# Altium PCB MB895.PCBDOC
Units mil, origin at the board's own origin, x right, y up, seen from the top; angles counter-clockwise.
Board outline 3325 x 1735.28 mil, 2 copper layers (TopLayer, BottomLayer); 41 components, 40 nets, 213 pads, 137 vias.
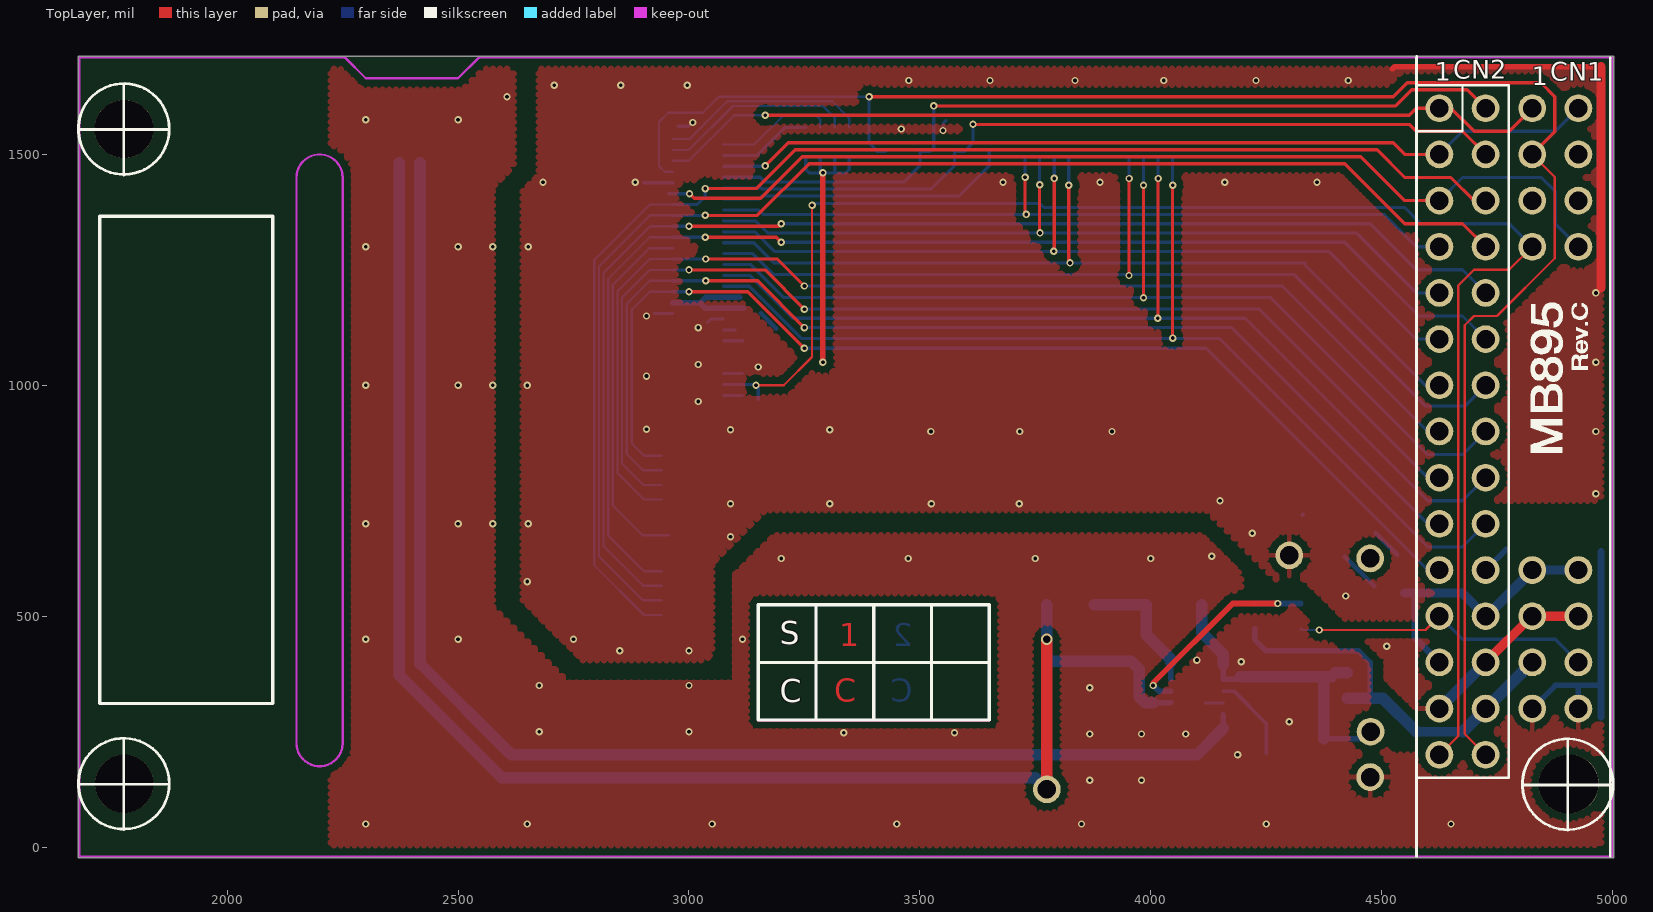
[diagram p0: TopLayer view]
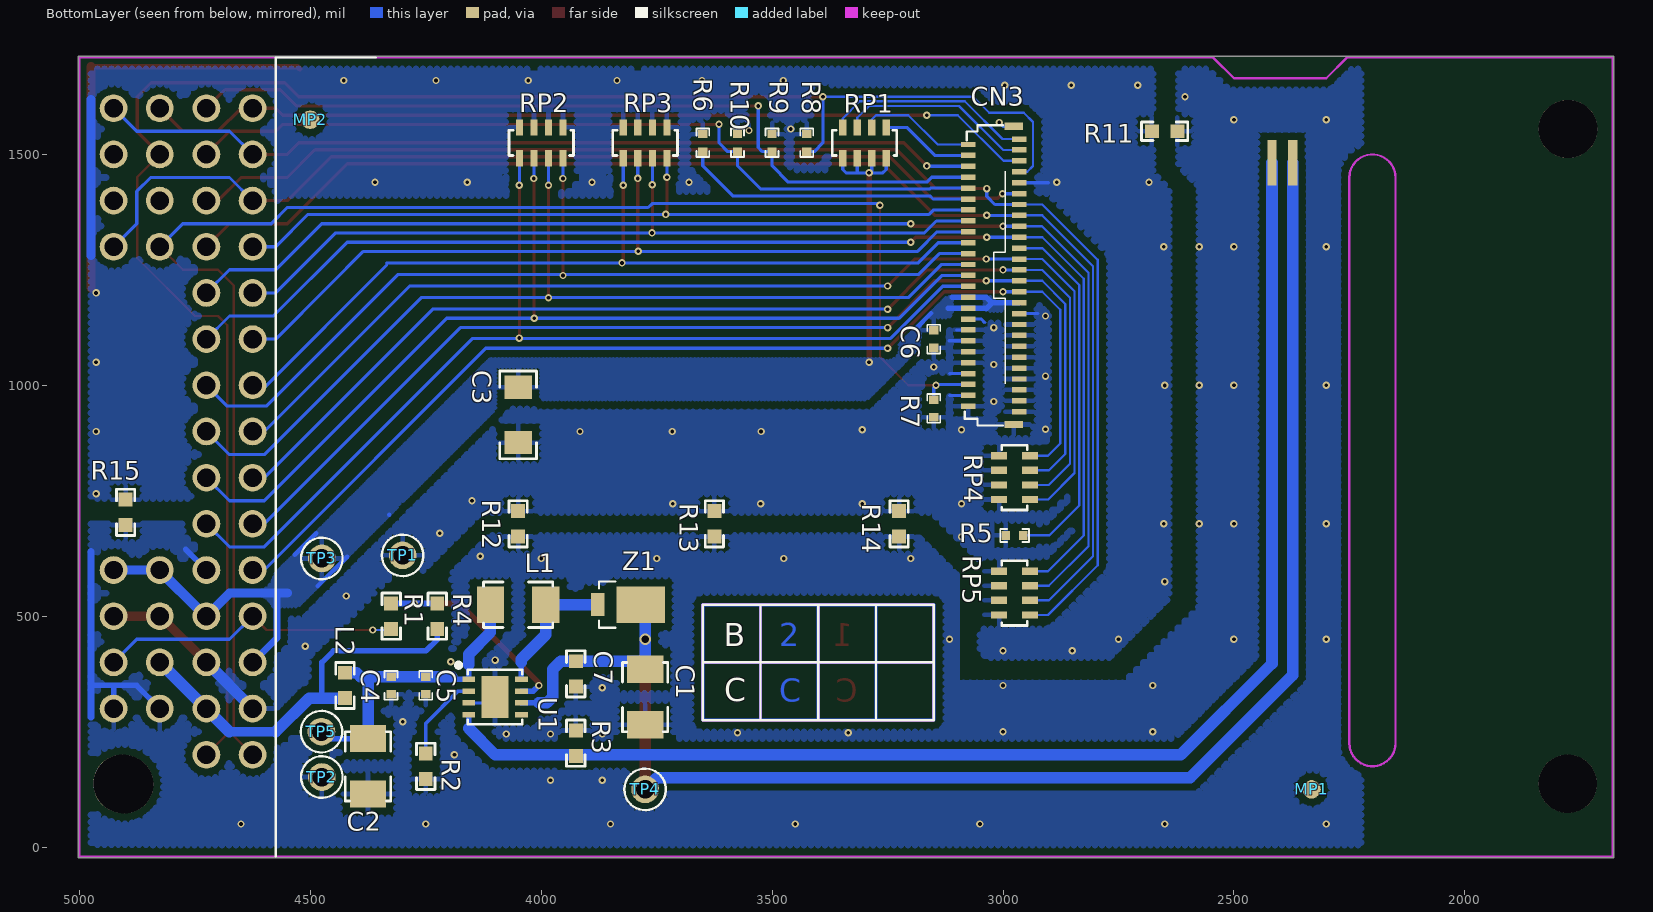
[diagram p1: BottomLayer view, seen from below]

## Layer stack, top to bottom
TopSolder: solder mask 0.4, Solder Resist, Dk 3.5
TopLayer: signal copper 1.4
Dielectric1: core 12.6, FR-4, Dk 4.8
BottomLayer: signal copper 1.4
BottomSolder: solder mask 0.4, Solder Resist, Dk 3.5

## Board outline
1677.5,-22.78 5002.5,-22.78 5002.5,1712.5 1677.5,1712.5

## Design rules (kind name [scope] priority, off if disabled: settings)
Clearance Clearance_5 [(InPoly)] p1: gap=15 ignorepadtopadclearanceinfootprint=FALSE except(0: Arc-Hole Track-Hole SMDPad-Hole THPad-Hole Via-Hole Fill-Hole Poly-Hole Region-Hole Text-Hole)
Clearance [All] p2: gap=5 ignorepadtopadclearanceinfootprint=FALSE except(0: Arc-Hole Track-Hole SMDPad-Hole THPad-Hole Via-Hole Fill-Hole Poly-Hole Region-Hole Text-Hole)
ComponentClearance [All] p1 off: gap=10 collisioncheckmode=3 verticalgap=10 showdistances=FALSE
FabricationTestPointUsage TestPointUsage [All] p1: valid=0 allowmultiple=FALSE
FabricationTestpoint Testpoint [All] p1: side=3 testpointundercomponent=TRUE minsize=40 maxsize=100 preferedsize=60 minholesize=20 maxholesize=40 preferedholesize=32 testpointgrid=1 allowsidetop=TRUE allowsidebottom=TRUE usegrid=TRUE gridtolerance=0.01
PolygonConnect [All] p1: connectstyle=Relief reliefconductorwidth=10 reliefentries=4 polygonreliefangle="90 Angle" airgapwidth=10
RoutingVias RoutingVias_1 [All] p1: holewidth=8 width=16 viastyle="Through Hole" minholewidth=8 minwidth=16 maxholewidth=28 maxwidth=50
SolderMaskExpansion [All] p1: expansion=4 istentingtop=FALSE
Width Width_1 [InNet('BLGND')] p1: maxlimit=300 minlimit=7 preferedwidth=12
Width Width_2 [InNet('BLVDD')] p2: maxlimit=300 minlimit=7 preferedwidth=12
Width Width_3 [InNet('VDD')] p3: maxlimit=300 minlimit=7 preferedwidth=10
Width [All] p4: maxlimit=300 minlimit=5 preferedwidth=7
27 further rules are at their usual default settings.

## Classes and differential pairs
component class MB895C: C1 C2 C3 C4 C5 C6 CN1 CN2 CN3 L1 L2 MP1 MP2 R1 R2 R3 R4 R5 R6 R7 R8 R9 R10 R11 R12 R13 R14 R15 RP1 RP2 RP3 RP4 RP5 U1 Z1
component class MB694: C1 C2 C3 CN3 L1 R1 R2 R3 R4 R5 R6 R7 R8 R9 R10 RP1 RP2 RP3 RP4 RP5 U1 Z1
component class MB542: C1 C2 CN3 L1 R1 R2 R3 R4 R5 R6 R7 R8 R9 R10 R11 R12 RP1 RP2 RP3 RP4 RP5 U2 Z1
component class ColorLCD_Module: C1 C2 CN3 L1 R1 R2 R3 R4 R5 R6 R7 R8 U2 Z1
component class ColorLCD_ModuleA: C1 C2 CN3 L1 R1 R2 R3 R4 R5 R6 R7 R8 RP1 RP2 RP3 RP4 RP5 U2 Z1
component class MB895: C1 C2 C3 C4 C5 C6 CN3 L1 L2 R1 R2 R3 R4 R5 R6 R7 R8 R9 R10 RP1 RP2 RP3 RP4 RP5 U1 Z1
component class MB895B: C1 C2 C3 C4 C5 C6 CN1 CN2 CN3 L1 L2 R1 R2 R3 R4 R5 R6 R7 R8 R9 R10 RP1 RP2 RP3 RP4 RP5 U1 Z1

## Components (designator, comment, footprint, x,y, rotation, side; value= is the part's Value field where it differs from the comment)
C1 "476P/35V" 3225C 3775,325 r90 bottom
C2 "476P/35V" 3225C 4375,175 r90 bottom
C3 "476P" 1206C 4050,935.72 r90 bottom
C4 "100nF" 0402C 4325,350 r270 bottom
C5 "10nF" 0402C 4250,350 r270 bottom
C6 "100nF" 0402C 3150,1100 r270 bottom
C7 "10nF" 0603C 3925,375 r270 bottom
CN1 "SPI connector" AM240320A 1777.06,137.28 r0 top
CN2 "16-bit connector" AM240*320B 1777.06,137.28 r0 top
CN3 "FH26W-51S-0.3SHW(60)" AM240320B 4575,1710 r180 bottom
L1 "4.7uH(1A)" 3225L 4050,525 r0 bottom
L2 "BEAD" 0603L 4425,350 r270 bottom
MP1 "" markpoint_1.0 2331.94,125 r0 top
MP2 "" markpoint_1.0 4500,1575 r0 top
R1 "0" 0603R 4325,500 r90 bottom
R2 "100K" 0603R 4250,175 r90 bottom
R3 "10" 0603R 3925,225 r90 bottom
R4 "[N/A]" 0603R 4225,500 r90 bottom
R5 "4K7" 0402R 2975,675 r0 bottom
R6 "4K7" 0402R 3650,1525 r90 bottom
R7 "4K7" 0402R 3150,950 r270 bottom
R8 "4K7" 0402R 3425,1525 r90 bottom
R9 "4K7" 0402R 3500,1525 r90 bottom
R10 "4K7" 0402R 3575,1525 r90 bottom
R11 "[N/A]" 0603R 2650,1550 r180 bottom
R12 "[N/A]" 0603R 4050,700 r270 bottom
R13 "[N/A]" 0603R 3625,700 r270 bottom
R14 "[N/A]" 0603R 3225,700 r270 bottom
R15 "[N/A]" 0603R 4900,725 r270 bottom
RP1 "10K" RES-4B#1 3300,1525 r0 bottom
RP2 "10K" RES-4B#2 4000,1525 r0 bottom
RP3 "10K" RES-4B#2 3775,1525 r0 bottom
RP4 "10K" RES-4B#1 2975,800 r90 bottom
RP5 "10K" RES-4B#1 2975,550 r90 bottom
TP1 "" TP 4300,631.72 r180 bottom
TP2 "" TP 4475,151.72 r180 bottom
TP3 "" TP 4475,625 r180 bottom
TP4 "" TP 3775,125 r180 bottom
TP5 "" TP 4475.94,250 r180 bottom
U1 "STLD40DPUR" QFNT8 4100,325 r270 bottom
Z1 "STPS1L40M" DO216AA 3850,525 r0 bottom

## Footprints (in the part's own frame and the unit in brackets; to place one, negate y for a bottom-side part, rotate by r counter-clockwise, add the part's x,y. Pads: shape width x height; smd on the part's side, far side on the other; paste and mask are expansions set on the pad)
0402C [mil]
  rect 18x20 smd: 1(19,0) 2(-19,0)
  silkscreen extent -31,-14 31,14
0402R [mil]
  rect 18x20 smd: 1(19,0) 2(-19,0)
  silkscreen extent -31,-14 31,14
0603C [mil]
  rect 30x30 smd: 1(27.5,0) 2(-27.5,0)
  silkscreen extent -50,-20 50,20
0603L [mil]
  rect 30x30 smd: 1(27.5,0) 2(-27.5,0)
  silkscreen extent -50,-20 50,20
0603R [mil]
  rect 30x30 smd: 1(27.5,0) 2(-27.5,0)
  silkscreen extent -50,-20 50,20
1206C [mil]
  rect 50x60 smd: 1(60,0) 2(-60,0)
  silkscreen extent -95,-40 95,40
3225C [mm]
  rect 1.5x2 smd: 1(1.524,0) 2(-1.524,0)
  silkscreen extent -1.91,-1.25 1.91,1.25
3225L [mm]
  rect 1.5x2 smd: 1(1.524,0) 2(-1.524,0)
  silkscreen extent -1.91,-1.25 1.91,1.25
AM240*320B [mil]
  round 125.98 hole 125.98 unplated: 0(-1,1417.72) 0(0,0) 0(3125.94,-1.28)
  round 60 hole 40: 1(2847.94,1462.72) 2(2947.94,1462.72) 3(2847.94,1362.72) 4(2947.94,1362.72) 5(2847.94,1262.72) 6(2947.94,1262.72) 7(2847.94,1162.72) 8(2947.94,1162.72) 9(2847.94,1062.72) 10(2947.94,1062.72) 11(2847.94,962.72) 12(2947.94,962.72) 13(2847.94,862.72) 14(2947.94,862.72) 15(2847.94,762.72) 16(2947.94,762.72) 17(2847.94,662.72) 18(2947.94,662.72) 19(2847.94,562.72) 20(2947.94,562.72) 21(2847.94,462.72) 22(2947.94,462.72) 23(2847.94,362.72) 24(2947.94,362.72) 25(2847.94,262.72) 26(2947.94,262.72) 27(2847.94,162.72) 28(2947.94,162.72) 29(2847.94,62.72) 30(2947.94,62.72)
  silkscreen extent -99,-158 3224,1573
AM240320A [mil]
  round 125.98 hole 125.98 unplated: 0(0,0) 0(0,1417.72) 0(3129.92,0)
  round 60 hole 40: 1(3048.94,1462.72) 2(3148.94,1462.72) 3(3048.94,1362.72) 4(3148.94,1362.72) 5(3048.94,1262.72) 6(3148.94,1262.72) 7(3048.94,1162.72) 8(3148.94,1162.72) 9(3048.94,462.72) 10(3148.94,462.72) 11(3048.94,362.72) 12(3148.94,362.72) 13(3048.94,262.72) 14(3148.94,262.72) 15(3048.94,162.72) 16(3148.94,162.72)
  silkscreen extent 2799,-158 2799,1575
AM240320B [mm]
  rect 1x0.4 smd: 0(40.6,-20.189) 0(40.6,-3.789)
  rect 0.8x0.3 smd: 1(40.9,-4.489) 2(38.1,-4.789) 3(40.9,-5.089) 4(38.1,-5.389) 5(40.9,-5.689) 6(38.1,-5.989) 7(40.9,-6.289) 8(38.1,-6.589) 9(40.9,-6.889) 10(38.1,-7.189) 11(40.9,-7.489) 12(38.1,-7.789) 13(40.9,-8.089) 14(38.1,-8.389) 15(40.9,-8.689) 16(38.1,-8.989) 17(40.9,-9.289) 18(38.1,-9.589) 19(40.9,-9.889) 20(38.1,-10.189) 21(40.9,-10.489) 22(38.1,-10.789) 23(40.9,-11.089) 24(38.1,-11.389) 25(40.9,-11.689) 26(38.1,-11.989) 27(40.9,-12.289) 28(38.1,-12.589) 29(40.9,-12.889) 30(38.1,-13.189) 31(40.9,-13.489) 32(38.1,-13.789) 33(40.9,-14.089) 34(38.1,-14.389) 35(40.9,-14.689) 36(38.1,-14.989) 37(40.9,-15.289) 38(38.1,-15.589) 39(40.9,-15.889) 40(38.1,-16.189) 41(40.9,-16.489) 42(38.1,-16.789) 43(40.9,-17.089) 44(38.1,-17.389) 45(40.9,-17.689) 46(38.1,-17.989) 47(40.9,-18.289) 48(38.1,-18.589) 49(40.9,-18.889) 50(38.1,-19.189) 51(40.9,-19.489)
  rect 0.508x2.5 smd: 52(55.942,-5.788) 53(54.799,-5.788)
  silkscreen extent 0,-43.95 40.14,0
DO216AA [mil]
  rect 30x50 smd: 1(27.5,0)
  rect 105.12x78.74 smd: 2(-65.06,0)
  silkscreen extent -10,-50 25,50
markpoint_1.0 [mil]
  round 40 smd far side: 0(0,0)
QFNT8 [mm]
  rect 0.3x0.7 smd: 1(-0.975,-1.45) 2(-0.325,-1.45) 3(0.325,-1.45) 4(0.975,-1.45) 5(0.975,1.45) 6(0.325,1.45) 7(-0.325,1.45) 8(-0.975,1.45)
  rect 2.3x1.5 smd: 9(0,0)
  silkscreen extent -1.88,-2.13 1.5,1.5
RES-4B#1 [mil]
  rect 15.75x35 smd: 1(47.24,-33.5) 2(47.24,33.5) 3(15.75,-33.5) 4(15.75,33.5) 5(-15.75,-33.5) 6(-15.75,33.5) 7(-47.24,-33.5) 8(-47.24,33.5)
  silkscreen extent -70,-28 70,28
RES-4B#2 [mil]
  rect 15.75x35 smd: 1(47.24,33.5) 2(47.24,-33.5) 3(15.75,33.5) 4(15.75,-33.5) 5(-15.75,33.5) 6(-15.75,-33.5) 7(-47.24,33.5) 8(-47.24,-33.5)
  silkscreen extent -70,-28 70,28
TP [mil]
  round 60 hole 40: 1(0,0)
  silkscreen extent -45,-45 45,45

## Part data
C1 C4 C5 C6 C7: library part CAP, "Capacitor"
C2 C3: library part "Cap Pol1", "Polarized Capacitor (Radial)"
CN1 CN2: library part ColorLCD_module
CN3: library part AM240320LTNQW00H
L1 L2: library part Inductor, "Inductor"
R1 R2 R3 R4 R5 R6 R7 R8 R9 R10 R11 R12 R13 R14 R15: library part Res1, "Resistor"
RP1 RP2 RP3 RP4 RP5: library part RES4B
TP1 TP2 TP3 TP4 TP5: library part TP
U1: library part STLD40DPMR
Z1: library part "D Schottky", "Schottky Diode"

## Via types
v1: diameter 16, hole 8, TopLayer to BottomLayer, tented both sides, 129 vias
v2: diameter 16, hole 8, TopLayer to BottomLayer, 7 vias
v3: diameter 25, hole 16, TopLayer to BottomLayer, tented both sides, 1 vias

## Nets (pads, with @x,y where several pads share a name; then routed paths per layer and width w, separated by ;. In a path a pad name is that pad's centre, name@x,y a point inside that pad or via, vN(x,y) a via of type N, cw(c..) or ccw(c..) an arc to the next point about the centre after c; other vN are vias at no path point)
#RESET: CN1.8 CN2.5 CN3.11 | length 2194.5
  TopLayer w7: v1(3001,1415) 3011,1405 3155,1405 3245,1495 4455,1495 4550,1400 CN2.5 CN2.5@4650,1400
  BottomLayer w7: CN3.11@2956,1415 v1@2995.93,1415 ; CN2.5 4675,1450 4845.94,1450 4876,1419.94 4876,1350 4890.38,1335.62 CN1.8
BL_CONTROL: CN1.14 CN2.23 R1.2 | length 655.9
  TopLayer w5: v1(4365,470) 4595,470 CN2.23
  BottomLayer w5: R1.2 4327.5,470 v1(4365,470)
  BottomLayer w7: CN2.23 4675,450 4876,450 CN1.14
BLGND: C1.2 C2.2 C4.1 C5.1 C7.1 CN1.15 CN1.16 CN2.22 R2.2 R3.1 R11.1 R12.1 R13.1 R14.1 R15.1 TP2.1 U1.3 U1.9 | length 681.1
  BottomLayer w7: U1.9@4117.2,312.2 U1.3
  BottomLayer w12: CN2.22 4770,645 ; CN1.15 4876,350 4975,350 ; CN1.16 4926,349
  BottomLayer w15: 4975,281.15 4975,640
  other v1: 2300,50 2650,50 3050,50 3450,50 3850,50 4250,50 4650,50 3867.94,145 3979.94,145 4187.94,200 3867.94,245 3979.94,245 4075.94,245 3335,247.72 3575,247.72 2675.94,250 3000,250 4300,271.72 3867.94,345 2675.94,350 3000,350 4195.94,401.5 4099.94,405 2300,450 2500,450 3200,625 3475,625 3750,625 4000,625 4131.94,630 2300,700 2500,700 2575,700 2300,1000 2500,1000 2575,1000 2300,1300 2500,1300 2575,1300 2300,1575 2500,1575
  other v2: 3115.94,450 2605.94,1625
BLVDD: CN1.13 CN2.28 L2.1 R4.2 | length 864.1
  BottomLayer w12: R4.2 4225,450 4250,425 4450,425 4475,400 4475,322.5
  BottomLayer w20: 4575.28,249.72 4675.72,249.72
  BottomLayer w25: L2.1 4502.5,322.5 4575.28,249.72 ; 4675.72,249.72 4725.5,299.5 CN1.13
CS: CN1.1 CN2.1 CN3.5 | length 1949.9
  TopLayer w7: v1(3165,1585) 4560,1585 4575,1600 4650,1600 4700,1550 4776,1550 CN1.1
  BottomLayer w5: CN3.5 2999.03,1486.03 3098,1585 v1(3165,1585)
DOTCLK: CN3.2 RP1.5 | length 256.7
  BottomLayer w5: CN3.2 3141.46,1521.46 3205,1585 3275,1585 3284.25,1575.75 RP1.5
ENABLE: CN3.1 RP1.1 | length 451
  BottomLayer w5: CN3.1 3001.28,1533.28 3083,1615 3310,1615 3347.24,1577.76 RP1.1
GND: C3.2 C6.1 CN1.11 CN1.12 CN2.26 CN2.27 CN3.0 CN3.9 CN3.33 CN3.34 CN3.35 CN3.36 CN3.37 CN3.38 CN3.39 CN3.40 CN3.41 CN3.42 CN3.43 CN3.44 CN3.45 CN3.47 CN3.48 CN3.49 CN3.50 CN3.51 R5.1 R6.1 R7.1 R8.1 R9.1 R10.1 R11.2 R12.2 R13.2 R14.2 R15.2 RP2.2 RP2.4 RP2.6 RP2.8 RP3.2 RP3.4 RP3.6 RP3.8 RP4.2 RP4.4 RP4.6 RP4.8 RP5.2 RP5.4 RP5.6 RP5.8 TP1.1 | length 2025.9
  TopLayer w12: 4523.23,1685 4528.23,1690 4975,1690 ; v1(4963.94,1200) 4975,1211.06
  TopLayer w20: CN2.26 4825,500 CN1.12 ; 4975,1211.06 4975,1690
  TopLayer w25: CN1.11 CN1.11@4830,504
  BottomLayer w7: 2901.21,1438.79 CN3.9 ; 2924.26,1155.32 CN3.33 ; CN3.0@2976.57,1560.83 2999.83,1560.83 v1(3008,1569) ; 3039.25,1135.72 3047.05,1143.51 CN3.34 ; CN3.48 3115.81,978.16 ; CN3.44 3115.81,1025.4 ; CN3.38 3116.98,1096.27 ; CN3.36 3100.11,1119.89 ; v2(3550,1551.72) 3550,1567.06 3555.94,1573
  BottomLayer w20: 4975,1281.15 4975,1618.85
  BottomLayer w25: CN2.27 CN2.26
  other v1: 2850,425 3000,425 2750,450 4422,543.72 2650,575 3090,671.72 4220,679.72 2651.94,700 3090,743.72 3305,743.72 3525,743.72 3715,743.72 4150,750 4963.94,765 3523.94,900 3715.94,900 3915.94,900 4963.94,900 3090,903.72 3305,903.72 2907.94,905 3019.94,965 2650,999.72 2907.94,1020 3150,1039.72 3019.94,1045 4963.94,1050 3019.94,1125 2907.94,1150 2651.94,1300 2683.94,1440 2883.94,1440 4160,1439.72 4360,1439.72 2707.94,1650 2851.94,1650 2995.94,1650 3475.94,1660 3651.94,1660 3835.94,1660 4027.94,1660 4227.94,1660 4427.94,1660
  other v2: 4510.94,435 3680,1439.72 3890,1439.72 3459.94,1555
HSYNC: CN3.3 RP1.3 | length 421.9
  BottomLayer w5: CN3.3 2999.65,1509.65 3095,1605 3290,1605 3315.75,1579.25 RP1.3
K: CN3.53 R3.2 U1.4 | length 2959.2
  BottomLayer w12: 4157.09,257.09 U1.4
  BottomLayer w25: CN3.53 2417.54,397.46 2615,200 4100,200 4157.09,257.09
NetL1_2: L1.2 U1.8 Z1.1 | length 303.1
  BottomLayer w12: U1.8 4042.91,407.09
  BottomLayer w25: Z1.1 L1.2 3990,460 4042.91,407.09 4042.91,400
NetR1_1: R1.1 R4.1 U1.7 | length 489.4
  TopLayer w12: v1(4005,350) 4005,355 4177.5,527.5 v1(4275,527.5)
  BottomLayer w12: v1(4005,350) 4017.2,337.8 U1.7 ; R4.1 R1.1
NetR2_1: R2.1 U1.2 | length 187.2
  BottomLayer w8: U1.2 4180,337.8 4250,267.8 R2.1
PD0: CN3.12 R6.2 | length 635.7
  BottomLayer w7: CN3.12 3151.65,1403.35 3158.29,1410 3585,1410 3650,1475 R6.2
PD1: CN2.6 CN3.13 RP5.7 | length 2936.5
  TopLayer w7: v1(3035,1426) 3146,1426 3230,1510 4490,1510 4550,1450 4650,1450 4700,1400 CN2.6
  BottomLayer w5: RP5.7 2902.76,502.76 2795,610.51 2795,1271.54 2915,1391.54 CN3.13
  BottomLayer w7: CN3.13 3017.54,1391.54 3035,1409 v1(3035,1426)
PD2: CN2.7 CN3.14 RP3.7 | length 1702.3
  TopLayer w7: v1@3727.76,1372.24 v1(3727.76,1450.47)
  BottomLayer w7: CN3.14 3150.27,1379.73 3160,1370 4505,1370 4575,1300 CN2.7 ; v1(3727.76,1450.47) RP3.7
  other v1: 3730,1370
PD3: CN2.8 CN3.15 RP5.5 | length 2890.6
  TopLayer w7: v1(3035,1367.92) 3147.92,1367.92 3260,1480 4420,1480 4550,1350 4675,1350 CN2.8
  BottomLayer w5: RP5.5 2900.75,534.25 2805,630 2805,1257.92 2915,1367.92 CN3.15
  BottomLayer w7: CN3.15 v1(3035,1367.92)
PD4: CN2.9 CN3.16 RP3.5 | length 1775.3
  TopLayer w7: v1@3759.25,1330.75 v1(3759.25,1434.25)
  BottomLayer w7: CN3.16 3144.29,1355.71 3170,1330 4445,1330 4575,1200 CN2.9 ; v1(3759.25,1434.25) RP3.5
  other v1: 3760,1330
PD5: CN2.10 CN3.17 RP5.3 | length 2774.6
  TopLayer w7: v1(3000,1344.3) 3194.3,1344.3 v1(3200,1350)
  BottomLayer w5: RP5.3 2900.75,565.75 2815,651.5 2815,1243.9 2915.4,1344.3 CN3.17
  BottomLayer w7: CN3.17@2964.76,1343.9 CN3.17@2968.9,1343.9 ; CN3.17 v1(3000,1344.3) ; v1(3200,1350) 4475,1350 4575,1250 4675,1250 CN2.10
PD6: CN2.11 CN3.18 RP3.3 | length 1846.9
  TopLayer w7: v1@3790.75,1290.75 v1(3790.75,1447.97)
  BottomLayer w7: CN3.18 3142.91,1332.09 3185,1290 4385,1290 4458.86,1216.14 4575,1100 CN2.11 ; v1(3790.75,1447.97) RP3.3
  other v1: 3790,1290
PD7: CN2.12 CN3.19 RP5.1 | length 2733.1
  TopLayer w7: v1(3035,1320.68) 3189.32,1320.68 v1(3200,1310)
  BottomLayer w5: RP5.1 2902.76,597.24 2825,675 2825,1230.68 2915,1320.68 CN3.19
  BottomLayer w7: CN3.19 v1(3035,1320.68) ; v1(3200,1310) 4420,1310 4580,1150 4675,1150 CN2.12
PD8: CN2.13 CN3.20 RP3.1 | length 1898.8
  TopLayer w7: v1@3822.24,1267.76 v1(3822.24,1432.96)
  BottomLayer w7: CN3.20 3140.32,1308.47 3183.79,1265 v1@3822.24,1265 ; v1(3822.24,1432.96) RP3.1 ; v1(3825,1265) 4335,1265 ; 4335,1259.72 CN2.13@4600,994.72 ; CN2.13@4600,1000 CN2.13
PD9: CN3.21 R5.2 | length 787.9
  BottomLayer w5: R5.2 2900,675 2835,740 2835,1217.05 2915,1297.05 CN3.21
PD10: CN2.14 CN3.22 RP2.7 | length 2062
  TopLayer w7: v1@3950.51,1240 v1(3952.76,1237.76) ; v1@3953,1238 v1(3953,1447.72)
  BottomLayer w7: CN3.22 3137.73,1284.84 3182.57,1240 4310,1240 4595,955 4680,955 CN2.14 ; RP2.7 3952.76,1447.96 v1(3953,1447.72)
PD11: CN2.15 CN3.23 RP4.7 | length 2477.3
  TopLayer w7: v1(3036,1273.43) 3191.57,1273.43 v1(3250,1215)
  BottomLayer w5: RP4.7 2902.24,752.76 2845,810 2845,1203.43 2915,1273.43 CN3.23
  BottomLayer w7: CN3.23 v1(3036,1273.43) ; v1(3250,1215) 4285,1215 4600,900 CN2.15
PD12: CN2.16 CN3.24 RP2.5 | length 2143.3
  TopLayer w7: v1(3984.25,1189.25) v1(3984.25,1432.97)
  BottomLayer w7: CN3.24 3133.78,1261.22 3205,1190 4260,1190 4600,850 4675,850 CN2.16 ; v1(3984.25,1432.97) RP2.5
PD13: CN2.17 CN3.25 RP4.5 | length 2446.4
  TopLayer w7: v1(3000,1249.81) 3165.19,1249.81 v1(3250,1165)
  BottomLayer w5: RP4.5 2900.75,784.25 2855,830 2855,1189.81 2915,1249.81 CN3.25
  BottomLayer w7: CN3.25 v1(3000,1249.81) ; v1(3250,1165) 4235,1165 4273.05,1126.95 4600,800 CN2.17
PD14: CN2.18 CN3.26 RP2.3 | length 2218.9
  TopLayer w7: v1@4015.75,1145.75 v1@4015.75,1447.81
  BottomLayer w7: CN3.26 3132,1238 3225,1145 4205,1145 4600,750 4675,750 CN2.18 ; RP2.3 4015.75,1447.81 4015.84,1447.72 v1(4016,1447.72)
  other v1: 4015,1145
PD15: CN2.19 CN3.27 RP4.3 | length 2419.9
  TopLayer w7: v1(3036,1226.19) 3148.81,1226.19 v1(3250,1125)
  BottomLayer w5: RP4.3 2900.75,815.75 2865,851.5 2865,1176.19 2915,1226.19 CN3.27
  BottomLayer w7: CN3.27@2964.76,1225 CN3.27@2970,1225 ; CN3.27 v1(3036,1226.19) ; v1(3250,1125) 4175,1125 4600,700 CN2.19
PD16: CN2.20 CN3.28 RP2.1 | length 2293.7
  TopLayer w7: v1(4047.24,1102.24) v1(4047.24,1432.96)
  BottomLayer w7: CN3.28 3130.62,1214.38 3243.5,1101.5 4148.5,1101.5 4600,650 4675,650 CN2.20 ; v1(4047.24,1432.96) RP2.1
PD17: CN2.21 CN3.29 RP4.1 | length 2380.9
  TopLayer w7: v1(3000,1202.57) 3127.43,1202.57 3150.87,1179.13 v1(3250,1080)
  BottomLayer w5: RP4.1 2902.76,847.24 2875.94,874.06 2875.94,1163.37 2915.13,1202.57 CN3.29
  BottomLayer w7: CN3.29 v1(3000,1202.57) ; v1(3250,1080) 4120,1080 4600,600 CN2.21
RD: CN2.4 CN3.10 R10.2 | length 1777.3
  TopLayer w7: v1(3615,1565) 4560,1565 4575,1550 4675,1550 CN2.4
  BottomLayer w7: CN3.10 3156.81,1426.98 3158.79,1425 3525,1425 3575,1475 R10.2 3596,1506 3615,1525 v1(3615,1565)
RS: CN2.2 CN3.8 R9.2 | length 1824.7
  TopLayer w7: v1(3530,1605) 4530,1605 4565,1640 4685,1640 CN2.2
  BottomLayer w7: CN3.8 3154.4,1450.6 3165,1440 3465,1440 3500,1475 R9.2 3521,1506 3530,1515 v1(3530,1605)
SDI: CN1.3 CN2.30 CN3.7 R8.2 | length 3854.8
  TopLayer w5: CN2.30 4680,245 4680,1130 4700,1150 4750,1150 4875,1275 4875,1451 CN1.3
  TopLayer w7: v1(3390,1625) 4525,1625 4555,1655 4845,1655 4875,1625 4875,1549 CN1.3
  BottomLayer w5: CN3.7 2947.59,1462.41 2935,1475 2935,1570 2955,1590 3030,1590 3065,1625 v1(3390,1625)
  BottomLayer w7: v1(3390,1625) 3390,1525 3409,1506 R8.2
SDO: CN1.7 CN2.29 CN3.46 R7.2 | length 3406.7
  TopLayer w5: v1(3145,1000) 3205,1000 3266.5,1061.5 v1(3266.5,1390) ; CN2.29 4665.81,240.81 4665.81,1215.81 4700,1250 4776,1250 CN1.7
  BottomLayer w7: CN3.46 3143.22,1001.78 3150,995 R7.2 ; v1(3266.5,1390) 3270,1393.5 3760,1393.5 3768.5,1385 4549.72,1385 4584.72,1350 4776,1350 CN1.7
VDD: C3.1 C6.2 CN1.9 CN1.10 CN2.24 CN2.25 CN3.30 CN3.31 CN3.32 RP1.2 RP1.4 RP1.6 RP1.8 TP3.1 | length 1835.3
  TopLayer w12: v1(3290,1050) v1(3290,1460)
  BottomLayer w7: RP1.8 3252.76,1467.24 3260,1460 3340,1460 3347.24,1467.24 RP1.2 ; RP1.6 3284.25,1464.25 v1(3290,1460) ; 3315,1460 3315.75,1460.75 RP1.4
  BottomLayer w10: 3155.99,1155.78 3189.31,1122.46 ; 4419.94,629.06 4483.71,565.29 ; 4487.05,679.72 4533.73,633.03
  BottomLayer w12: CN3.31 3024.88,1178.94 3036.69,1190.76 3110.4,1190.76 ; 3023.19,1178.94 3035,1167.13 3118.33,1167.13 ; CN2.24 4735,500 CN1.9@4835,600
  BottomLayer w15: 4571.94,545 4571.94,453.06 CN2.25
  BottomLayer w20: 4550,550 4675,550 CN2.24 ; CN2.24@4725.5,499.5 CN1.9 CN1.10
VH: C1.1 C7.2 CN3.52 TP4.1 U1.6 Z1.2 | length 3407.5
  TopLayer w25: TP4.1@3774,126 TP4.1 v3(3775,450)
  BottomLayer w12: 4005,312.2 U1.6
  BottomLayer w25: CN3.52 2372.54,372.46 2595,150 3750,150 TP4.1 ; Z1.2@3775,525 3775,400.06 3777.44,402.5 3957.5,402.5 3975,385 3975,325 3987.8,312.2 4005,312.2
VL: C2.1 C4.2 C5.2 L1.1 L2.2 TP5.1 U1.1 | length 696
  BottomLayer w12: 4157.09,395 U1.1 4188.39,363.39 4194,369 ; C2.1 4460.94,235 TP5.1
  BottomLayer w25: L1.1 4110,465 4157.09,417.91 4157.09,395 ; 4194,369 4391.5,369 4400,377.5 L2.2 ; C2.1 4375,369
VSYNC: CN3.4 RP1.7 | length 202.9
  BottomLayer w7: CN3.4 3147.84,1497.84 3208.5,1558.5 RP1.7
WR_SCL: CN1.2 CN2.3 CN3.6 | length 1923.8
  TopLayer w7: v1(3165,1475) 3215,1525 4525,1525 4550,1500 CN2.3
  BottomLayer w7: CN3.6 3164.22,1474.22 v1(3165,1475) ; CN2.3 4675,1550 4876,1550 CN1.2
pads on no net: CN1.0 CN1.4 CN1.5 CN1.6 CN2.0 MP1.0 MP2.0 U1.5
copper on no net: | length 5515
  TopLayer w5: 3150,400 3650,400 ; 3275,275 3275,525 ; 3400,275 3400,525 ; 3525,525 3525,500 3525,275 ; 3650,510 3650,525 ; 3525,275 3150,275 3150,500 3150,525 3650,525 ; 3525,275 3650,275 3650,500 3650,525
  BottomLayer w7: 3275,275 3275,400 3275,525 ; 3400,275 3400,400 3400,525 ; 3525,525 3525,400 ; 3650,400 3525,400 ; 3150,400 3150,275 3525,275 ; 3150,400 3150,525 3650,525 3650,275 3525,275 ; 3150,400 3525,400 ; 3525,275 3525,400

## Polygon pours and split planes (outlines as drawn)
BLGND on TopLayer "TopLayer-BLGND" (hatched 90Degree grid 15 track 15, remove dead copper, pour order 0): 2225,1725 2620,1725 2620,1475 2575,1430 2575,520 2740,355 3085,355 3100,370 3100,590 3185,675 4110,675 4195,590 4195,527.5 4300,527.5 4375,452.5 4395,432.5 4405,422.5 4440,422.5 4470,392.5 4470,250 4495,225 4500,220 4520,200 4750,200 4750,350 5000,350 5000,-20 2225,-20
GND on TopLayer "TopLayer-GND" (hatched 90Degree grid 15 track 15, remove dead copper, pour order 1): 2675,1710 5000,1710 5000,750 4680,750 4680,300 4575,300 4515,360 4510,365 4510,405 4345,570 4335,580 4270,580 4120,730 3165,730 3050,615 3050,420 3035,405 2770,405 2640,535 2640,1420 2675,1455
VDD on BottomLayer "BottomLayer-VDD" (hatched 90Degree grid 8 track 10, remove dead copper, pour order 2): 2964.76,1178.94 3001,1178.94 3013,1190.94 3150.45,1190.94 3261.4,1080 4113,1080 4592,601 4604,589 4604,522 4527,522 4079,970 3295,970 3182.5,1082.5 3182.5,1100 3152.5,1130 3136,1130 3104,1162 3003.01,1162 2986.07,1178.94
PD16 on BottomLayer "BottomLayer-PD16" (hatched 90Degree grid 20 track 25, remove dead copper, pour order 3): 7071,550 6091,550 5836,805 5581,805 5561,785 5561,685 5591,655 5676,655 5706,625 5706,480 5729.13,480 5769.13,520 5769.13,685 5794.13,710 5841,710 6086,465 7071,465 7100.94,494.94 7106,500 7106,515
BLGND on BottomLayer "BottomLayer-BLGND" (hatched 90Degree grid 15 track 15, remove dead copper, pour order 4): 2250,1710 2620,1710 2620,1475 2575.94,1430.94 2575.94,520 2740.94,355 3085.94,355 3100.94,370 3100.94,590 3180.65,669.72 3185.94,675 4110.94,675 4194.22,591.72 4194.22,401.5 4455,401.5 4471.5,385 4471.5,322.5 4502.5,322.5 4575.28,249.72 4675.72,249.72 4725,299 4725,700 5000,700 5000,-20 2225,-20 2225,1710
GND on BottomLayer "BottomLayer-GND" (hatched 90Degree grid 15 track 15, remove dead copper, pour order 5): 2675,1715 2675,1460 2640,1425 2640,540 2770,410 3035,410 3050,425 3050,620 3155,725 4130,725 4270,585 4325,585 4480,430 4480,335 4502.5,335 4580,257.5 4680,257.5 4826,403.5 4826,509 4725,509 4725,755 4995,755 4995,1715

## Keep-outs
KeepOutLayer:
  lines w5: 3275,275 3275,400 3275,525 ; 3400,275 3400,400 3400,525 ; 3650,400 3525,400 ; 3150,400 3525,400 ; 3150,400 3150,275 3525,275 ; 3150,400 3150,525 3525,525 ; 3525,275 3525,400 ; 3525,275 3650,275 3650,525 3525,525 ; 3525,400 3525,525 ; 1680,-20.28 1680,1709.72 2255,1710 2300,1665 2500,1665 2545,1710 5000,1710 5000,-20 1680,-20.28 ; 2150,225 ccw(c2200,225) 2250,225 2250,1450 ccw(c2200,1450) 2150,1450 2150,225

## Other copper
TopLayer:
  text "1" at 3325,435 h50
  text "C" at 3315,315 h50
BottomLayer:
  text "2" at 3485,435 h50
  text "C" at 3485,315 h50

## Silkscreen, mask and mechanical layers (free items; w line width, h text height)
TopOverlay:
  drawing of 849 lines, arcs and shapes, not listed
  text "1" at 4615,1660 h40
  text "1" at 4825,1650 h40
  text "S" at 3197,439 h50
  text "C" at 3196,314 h50
BottomOverlay:
  lines w5: 3150,400 3650,400 ; 3275,275 3275,520 ; 3275,490 3275,525 ; 3400,275 3400,525 ; 3525,275 3525,525 ; 3150,275 3650,275 3650,525 3150,525 3150,275
  text "B" at 3605,435 h50
  text "C" at 3604,316 h50
Mechanical1:
  lines w5: 1680,-20.28 1680,1709.72 2255,1710 2300,1665 2500,1665 2545,1710 5000,1710 5000,-20 4995.5,-20.28 1680,-20.28 ; 2150,225 ccw(c2200,225) 2250,225 2250,1450 ccw(c2200,1450) 2150,1450 2150,225